# Altium PCB PCB_16x16.PcbDoc
Units mm, origin at the board's own origin, x right, y up, seen from the top; angles counter-clockwise.
Board outline 215 x 183 mm, 2 copper layers (Top Layer, Bottom Layer); 259 components, 32 nets, 560 pads, 280 vias.
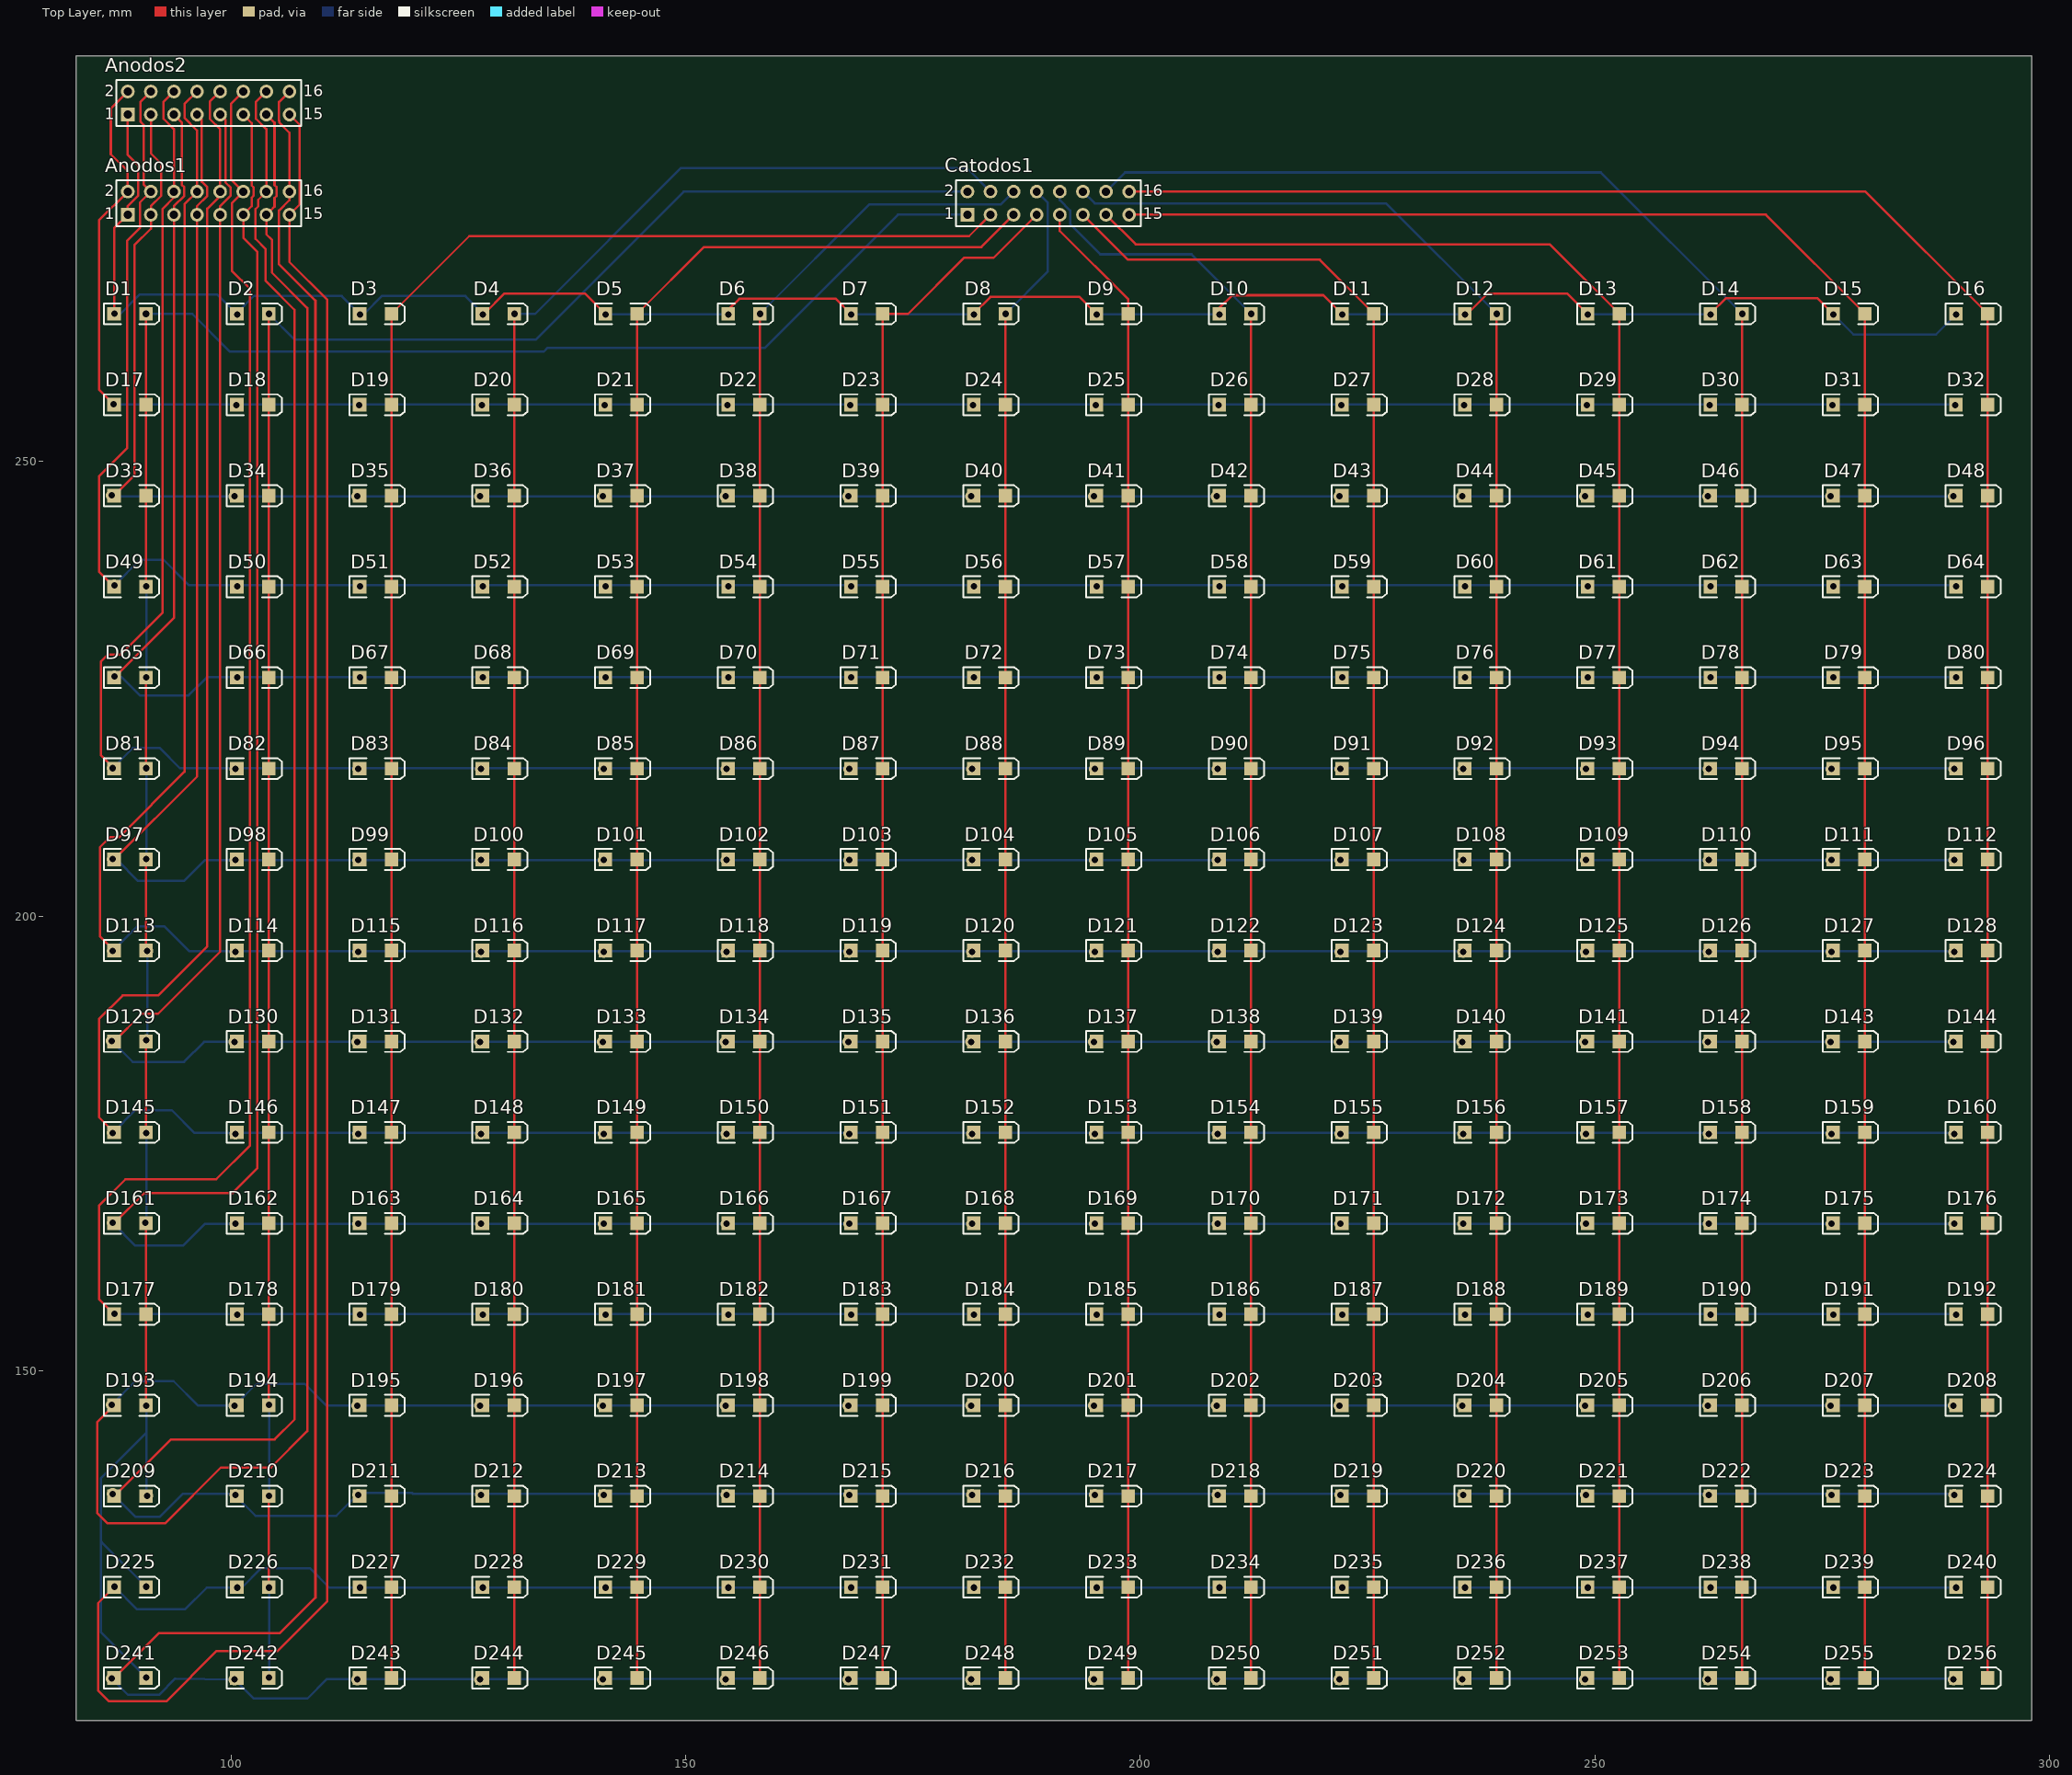
[diagram p0: Top Layer view]
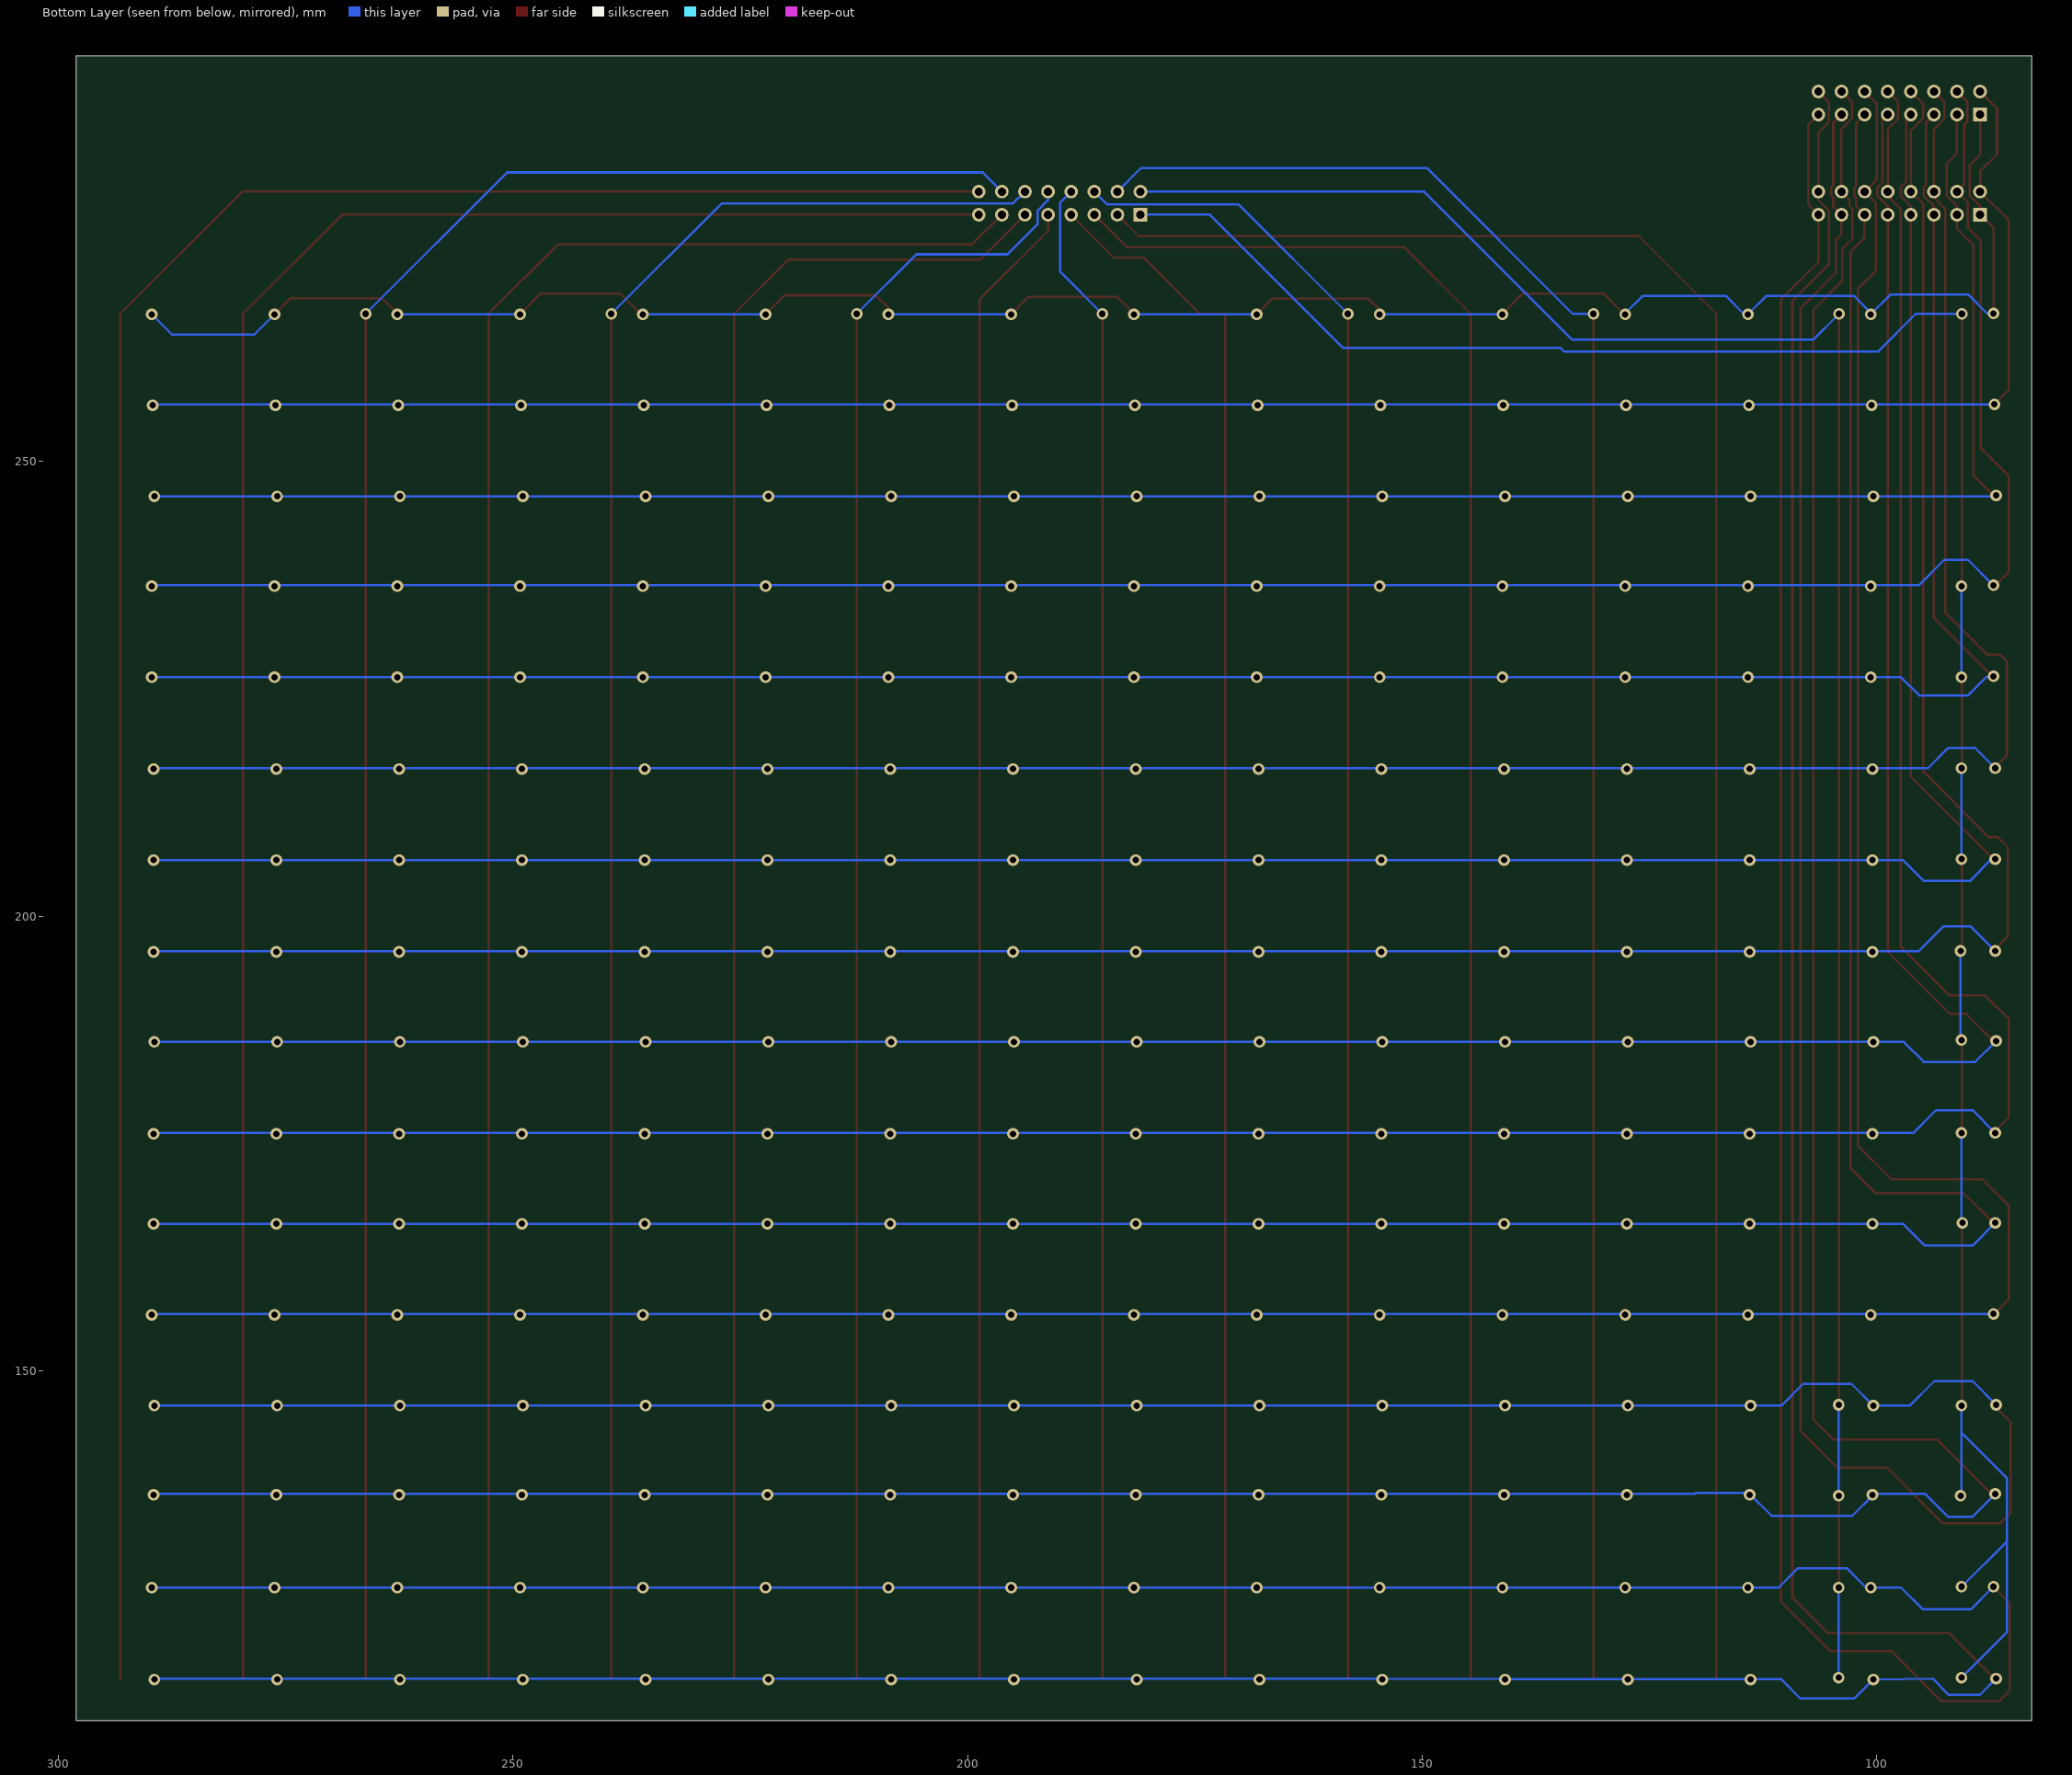
[diagram p1: Bottom Layer view, seen from below]

## Layer stack, top to bottom
Top Solder: solder mask 0.0102, Solder Resist, Dk 3.5
Top Layer: signal copper 0.0356
Dielectric 1: dielectric 0.32, FR-4, Dk 4.8
Bottom Layer: signal copper 0.0356
Bottom Solder: solder mask 0.0102, Solder Resist, Dk 3.5

## Board outline
83,111.6 298,111.6 298,294.6 83,294.6

## Design rules (kind name [scope] priority, off if disabled: settings)
Clearance [All] p1: gap=0.254
PolygonConnect [All] p1: connectstyle=Relief reliefconductorwidth=0.254 reliefentries=4 polygonreliefangle="90 Angle" airgapwidth=0.254
RoomDefinition "Esquematico LEDS" [InComponentClass('Esquematico LEDS')] p1: confinementstyle=ConfineIn formatcopy=TRUE lockcomponents=FALSE outline 83,294.6 83,111.6 298,111.6 298,294.6
RoutingVias [All] p1: holewidth=0.711 width=1.27 viastyle="Through Hole" minholewidth=0.711 minwidth=1.27 maxholewidth=0.711 maxwidth=1.27
SolderMaskExpansion [All] p1: expansion=0.102
Width [All] p1: maxlimit=0.254 minlimit=0.254 preferedwidth=0.254
30 further rules are at their usual default settings.

## Components (designator, comment, footprint, x,y, rotation, side; value= is the part's Value field where it differs from the comment)
Anodos1 "Header 8X2" HDR2X8 88.663,277.154 r0 top
Anodos2 "Header 8X2" HDR2X8 88.663,288.16 r0 top
Catodos1 "Header 8X2" HDR2X8 180.986,277.154 r0 top
D1 "LED2" 3.2X1.6X1.1 88.92,266.254 r0 top
D2 "LED2" 3.2X1.6X1.1 102.42,266.254 r0 top
D3 "LED2" 3.2X1.6X1.1 115.92,266.254 r0 top
D4 "LED2" 3.2X1.6X1.1 129.42,266.254 r0 top
D5 "LED2" 3.2X1.6X1.1 142.92,266.254 r0 top
D6 "LED2" 3.2X1.6X1.1 156.42,266.254 r0 top
D7 "LED2" 3.2X1.6X1.1 169.92,266.254 r0 top
D8 "LED2" 3.2X1.6X1.1 183.42,266.254 r0 top
D9 "LED2" 3.2X1.6X1.1 196.92,266.254 r0 top
D10 "LED2" 3.2X1.6X1.1 210.42,266.254 r0 top
D11 "LED2" 3.2X1.6X1.1 223.92,266.254 r0 top
D12 "LED2" 3.2X1.6X1.1 237.42,266.254 r0 top
D13 "LED2" 3.2X1.6X1.1 250.92,266.254 r0 top
D14 "LED2" 3.2X1.6X1.1 264.42,266.254 r0 top
D15 "LED2" 3.2X1.6X1.1 277.92,266.254 r0 top
D16 "LED2" 3.2X1.6X1.1 291.42,266.254 r0 top
D17 "LED2" 3.2X1.6X1.1 88.92,256.254 r0 top
D18 "LED2" 3.2X1.6X1.1 102.42,256.254 r0 top
D19 "LED2" 3.2X1.6X1.1 115.92,256.254 r0 top
D20 "LED2" 3.2X1.6X1.1 129.42,256.254 r0 top
D21 "LED2" 3.2X1.6X1.1 142.92,256.254 r0 top
D22 "LED2" 3.2X1.6X1.1 156.42,256.254 r0 top
D23 "LED2" 3.2X1.6X1.1 169.92,256.254 r0 top
D24 "LED2" 3.2X1.6X1.1 183.42,256.254 r0 top
D25 "LED2" 3.2X1.6X1.1 196.92,256.254 r0 top
D26 "LED2" 3.2X1.6X1.1 210.42,256.254 r0 top
D27 "LED2" 3.2X1.6X1.1 223.92,256.254 r0 top
D28 "LED2" 3.2X1.6X1.1 237.42,256.254 r0 top
D29 "LED2" 3.2X1.6X1.1 250.92,256.254 r0 top
D30 "LED2" 3.2X1.6X1.1 264.42,256.254 r0 top
D31 "LED2" 3.2X1.6X1.1 277.92,256.254 r0 top
D32 "LED2" 3.2X1.6X1.1 291.42,256.254 r0 top
D33 "LED2" 3.2X1.6X1.1 88.92,246.254 r0 top
D34 "LED2" 3.2X1.6X1.1 102.42,246.254 r0 top
D35 "LED2" 3.2X1.6X1.1 115.92,246.254 r0 top
D36 "LED2" 3.2X1.6X1.1 129.42,246.254 r0 top
D37 "LED2" 3.2X1.6X1.1 142.92,246.254 r0 top
D38 "LED2" 3.2X1.6X1.1 156.42,246.254 r0 top
D39 "LED2" 3.2X1.6X1.1 169.92,246.254 r0 top
D40 "LED2" 3.2X1.6X1.1 183.42,246.254 r0 top
D41 "LED2" 3.2X1.6X1.1 196.92,246.254 r0 top
D42 "LED2" 3.2X1.6X1.1 210.42,246.254 r0 top
D43 "LED2" 3.2X1.6X1.1 223.92,246.254 r0 top
D44 "LED2" 3.2X1.6X1.1 237.42,246.254 r0 top
D45 "LED2" 3.2X1.6X1.1 250.92,246.254 r0 top
D46 "LED2" 3.2X1.6X1.1 264.42,246.254 r0 top
D47 "LED2" 3.2X1.6X1.1 277.92,246.254 r0 top
D48 "LED2" 3.2X1.6X1.1 291.42,246.254 r0 top
D49 "LED2" 3.2X1.6X1.1 88.92,236.254 r0 top
D50 "LED2" 3.2X1.6X1.1 102.42,236.254 r0 top
D51 "LED2" 3.2X1.6X1.1 115.92,236.254 r0 top
D52 "LED2" 3.2X1.6X1.1 129.42,236.254 r0 top
D53 "LED2" 3.2X1.6X1.1 142.92,236.254 r0 top
D54 "LED2" 3.2X1.6X1.1 156.42,236.254 r0 top
D55 "LED2" 3.2X1.6X1.1 169.92,236.254 r0 top
D56 "LED2" 3.2X1.6X1.1 183.42,236.254 r0 top
D57 "LED2" 3.2X1.6X1.1 196.92,236.254 r0 top
D58 "LED2" 3.2X1.6X1.1 210.42,236.254 r0 top
D59 "LED2" 3.2X1.6X1.1 223.92,236.254 r0 top
D60 "LED2" 3.2X1.6X1.1 237.42,236.254 r0 top
D61 "LED2" 3.2X1.6X1.1 250.92,236.254 r0 top
D62 "LED2" 3.2X1.6X1.1 264.42,236.254 r0 top
D63 "LED2" 3.2X1.6X1.1 277.92,236.254 r0 top
D64 "LED2" 3.2X1.6X1.1 291.42,236.254 r0 top
D65 "LED2" 3.2X1.6X1.1 88.92,226.254 r0 top
D66 "LED2" 3.2X1.6X1.1 102.42,226.254 r0 top
D67 "LED2" 3.2X1.6X1.1 115.92,226.254 r0 top
D68 "LED2" 3.2X1.6X1.1 129.42,226.254 r0 top
D69 "LED2" 3.2X1.6X1.1 142.92,226.254 r0 top
D70 "LED2" 3.2X1.6X1.1 156.42,226.254 r0 top
D71 "LED2" 3.2X1.6X1.1 169.92,226.254 r0 top
D72 "LED2" 3.2X1.6X1.1 183.42,226.254 r0 top
D73 "LED2" 3.2X1.6X1.1 196.92,226.254 r0 top
D74 "LED2" 3.2X1.6X1.1 210.42,226.254 r0 top
D75 "LED2" 3.2X1.6X1.1 223.92,226.254 r0 top
D76 "LED2" 3.2X1.6X1.1 237.42,226.254 r0 top
D77 "LED2" 3.2X1.6X1.1 250.92,226.254 r0 top
D78 "LED2" 3.2X1.6X1.1 264.42,226.254 r0 top
D79 "LED2" 3.2X1.6X1.1 277.92,226.254 r0 top
D80 "LED2" 3.2X1.6X1.1 291.42,226.254 r0 top
D81 "LED2" 3.2X1.6X1.1 88.92,216.254 r0 top
D82 "LED2" 3.2X1.6X1.1 102.42,216.254 r0 top
D83 "LED2" 3.2X1.6X1.1 115.92,216.254 r0 top
D84 "LED2" 3.2X1.6X1.1 129.42,216.254 r0 top
D85 "LED2" 3.2X1.6X1.1 142.92,216.254 r0 top
D86 "LED2" 3.2X1.6X1.1 156.42,216.254 r0 top
D87 "LED2" 3.2X1.6X1.1 169.92,216.254 r0 top
D88 "LED2" 3.2X1.6X1.1 183.42,216.254 r0 top
D89 "LED2" 3.2X1.6X1.1 196.92,216.254 r0 top
D90 "LED2" 3.2X1.6X1.1 210.42,216.254 r0 top
D91 "LED2" 3.2X1.6X1.1 223.92,216.254 r0 top
D92 "LED2" 3.2X1.6X1.1 237.42,216.254 r0 top
D93 "LED2" 3.2X1.6X1.1 250.92,216.254 r0 top
D94 "LED2" 3.2X1.6X1.1 264.42,216.254 r0 top
D95 "LED2" 3.2X1.6X1.1 277.92,216.254 r0 top
D96 "LED2" 3.2X1.6X1.1 291.42,216.254 r0 top
D97 "LED2" 3.2X1.6X1.1 88.92,206.254 r0 top
D98 "LED2" 3.2X1.6X1.1 102.42,206.254 r0 top
D99 "LED2" 3.2X1.6X1.1 115.92,206.254 r0 top
D100 "LED2" 3.2X1.6X1.1 129.42,206.254 r0 top
D101 "LED2" 3.2X1.6X1.1 142.92,206.254 r0 top
D102 "LED2" 3.2X1.6X1.1 156.42,206.254 r0 top
D103 "LED2" 3.2X1.6X1.1 169.92,206.254 r0 top
D104 "LED2" 3.2X1.6X1.1 183.42,206.254 r0 top
D105 "LED2" 3.2X1.6X1.1 196.92,206.254 r0 top
D106 "LED2" 3.2X1.6X1.1 210.42,206.254 r0 top
D107 "LED2" 3.2X1.6X1.1 223.92,206.254 r0 top
D108 "LED2" 3.2X1.6X1.1 237.42,206.254 r0 top
D109 "LED2" 3.2X1.6X1.1 250.92,206.254 r0 top
D110 "LED2" 3.2X1.6X1.1 264.42,206.254 r0 top
D111 "LED2" 3.2X1.6X1.1 277.92,206.254 r0 top
D112 "LED2" 3.2X1.6X1.1 291.42,206.254 r0 top
D113 "LED2" 3.2X1.6X1.1 88.92,196.254 r0 top
D114 "LED2" 3.2X1.6X1.1 102.42,196.254 r0 top
D115 "LED2" 3.2X1.6X1.1 115.92,196.254 r0 top
D116 "LED2" 3.2X1.6X1.1 129.42,196.254 r0 top
D117 "LED2" 3.2X1.6X1.1 142.92,196.254 r0 top
D118 "LED2" 3.2X1.6X1.1 156.42,196.254 r0 top
D119 "LED2" 3.2X1.6X1.1 169.92,196.254 r0 top
D120 "LED2" 3.2X1.6X1.1 183.42,196.254 r0 top
D121 "LED2" 3.2X1.6X1.1 196.92,196.254 r0 top
D122 "LED2" 3.2X1.6X1.1 210.42,196.254 r0 top
D123 "LED2" 3.2X1.6X1.1 223.92,196.254 r0 top
D124 "LED2" 3.2X1.6X1.1 237.42,196.254 r0 top
D125 "LED2" 3.2X1.6X1.1 250.92,196.254 r0 top
D126 "LED2" 3.2X1.6X1.1 264.42,196.254 r0 top
D127 "LED2" 3.2X1.6X1.1 277.92,196.254 r0 top
D128 "LED2" 3.2X1.6X1.1 291.42,196.254 r0 top
D129 "LED2" 3.2X1.6X1.1 88.92,186.254 r0 top
D130 "LED2" 3.2X1.6X1.1 102.42,186.254 r0 top
D131 "LED2" 3.2X1.6X1.1 115.92,186.254 r0 top
D132 "LED2" 3.2X1.6X1.1 129.42,186.254 r0 top
D133 "LED2" 3.2X1.6X1.1 142.92,186.254 r0 top
D134 "LED2" 3.2X1.6X1.1 156.42,186.254 r0 top
D135 "LED2" 3.2X1.6X1.1 169.92,186.254 r0 top
D136 "LED2" 3.2X1.6X1.1 183.42,186.254 r0 top
D137 "LED2" 3.2X1.6X1.1 196.92,186.254 r0 top
D138 "LED2" 3.2X1.6X1.1 210.42,186.254 r0 top
D139 "LED2" 3.2X1.6X1.1 223.92,186.254 r0 top
D140 "LED2" 3.2X1.6X1.1 237.42,186.254 r0 top
D141 "LED2" 3.2X1.6X1.1 250.92,186.254 r0 top
D142 "LED2" 3.2X1.6X1.1 264.42,186.254 r0 top
D143 "LED2" 3.2X1.6X1.1 277.92,186.254 r0 top
D144 "LED2" 3.2X1.6X1.1 291.42,186.254 r0 top
D145 "LED2" 3.2X1.6X1.1 88.92,176.254 r0 top
D146 "LED2" 3.2X1.6X1.1 102.42,176.254 r0 top
D147 "LED2" 3.2X1.6X1.1 115.92,176.254 r0 top
D148 "LED2" 3.2X1.6X1.1 129.42,176.254 r0 top
D149 "LED2" 3.2X1.6X1.1 142.92,176.254 r0 top
D150 "LED2" 3.2X1.6X1.1 156.42,176.254 r0 top
D151 "LED2" 3.2X1.6X1.1 169.92,176.254 r0 top
D152 "LED2" 3.2X1.6X1.1 183.42,176.254 r0 top
D153 "LED2" 3.2X1.6X1.1 196.92,176.254 r0 top
D154 "LED2" 3.2X1.6X1.1 210.42,176.254 r0 top
D155 "LED2" 3.2X1.6X1.1 223.92,176.254 r0 top
D156 "LED2" 3.2X1.6X1.1 237.42,176.254 r0 top
D157 "LED2" 3.2X1.6X1.1 250.92,176.254 r0 top
D158 "LED2" 3.2X1.6X1.1 264.42,176.254 r0 top
D159 "LED2" 3.2X1.6X1.1 277.92,176.254 r0 top
D160 "LED2" 3.2X1.6X1.1 291.42,176.254 r0 top
D161 "LED2" 3.2X1.6X1.1 88.92,166.254 r0 top
D162 "LED2" 3.2X1.6X1.1 102.42,166.254 r0 top
D163 "LED2" 3.2X1.6X1.1 115.92,166.254 r0 top
D164 "LED2" 3.2X1.6X1.1 129.42,166.254 r0 top
D165 "LED2" 3.2X1.6X1.1 142.92,166.254 r0 top
D166 "LED2" 3.2X1.6X1.1 156.42,166.254 r0 top
D167 "LED2" 3.2X1.6X1.1 169.92,166.254 r0 top
D168 "LED2" 3.2X1.6X1.1 183.42,166.254 r0 top
D169 "LED2" 3.2X1.6X1.1 196.92,166.254 r0 top
D170 "LED2" 3.2X1.6X1.1 210.42,166.254 r0 top
D171 "LED2" 3.2X1.6X1.1 223.92,166.254 r0 top
D172 "LED2" 3.2X1.6X1.1 237.42,166.254 r0 top
D173 "LED2" 3.2X1.6X1.1 250.92,166.254 r0 top
D174 "LED2" 3.2X1.6X1.1 264.42,166.254 r0 top
D175 "LED2" 3.2X1.6X1.1 277.92,166.254 r0 top
D176 "LED2" 3.2X1.6X1.1 291.42,166.254 r0 top
D177 "LED2" 3.2X1.6X1.1 88.92,156.254 r0 top
D178 "LED2" 3.2X1.6X1.1 102.42,156.254 r0 top
D179 "LED2" 3.2X1.6X1.1 115.92,156.254 r0 top
D180 "LED2" 3.2X1.6X1.1 129.42,156.254 r0 top
D181 "LED2" 3.2X1.6X1.1 142.92,156.254 r0 top
D182 "LED2" 3.2X1.6X1.1 156.42,156.254 r0 top
D183 "LED2" 3.2X1.6X1.1 169.92,156.254 r0 top
D184 "LED2" 3.2X1.6X1.1 183.42,156.254 r0 top
D185 "LED2" 3.2X1.6X1.1 196.92,156.254 r0 top
D186 "LED2" 3.2X1.6X1.1 210.42,156.254 r0 top
D187 "LED2" 3.2X1.6X1.1 223.92,156.254 r0 top
D188 "LED2" 3.2X1.6X1.1 237.42,156.254 r0 top
D189 "LED2" 3.2X1.6X1.1 250.92,156.254 r0 top
D190 "LED2" 3.2X1.6X1.1 264.42,156.254 r0 top
D191 "LED2" 3.2X1.6X1.1 277.92,156.254 r0 top
D192 "LED2" 3.2X1.6X1.1 291.42,156.254 r0 top
D193 "LED2" 3.2X1.6X1.1 88.92,146.254 r0 top
D194 "LED2" 3.2X1.6X1.1 102.42,146.254 r0 top
D195 "LED2" 3.2X1.6X1.1 115.92,146.254 r0 top
D196 "LED2" 3.2X1.6X1.1 129.42,146.254 r0 top
D197 "LED2" 3.2X1.6X1.1 142.92,146.254 r0 top
D198 "LED2" 3.2X1.6X1.1 156.42,146.254 r0 top
D199 "LED2" 3.2X1.6X1.1 169.92,146.254 r0 top
D200 "LED2" 3.2X1.6X1.1 183.42,146.254 r0 top
D201 "LED2" 3.2X1.6X1.1 196.92,146.254 r0 top
D202 "LED2" 3.2X1.6X1.1 210.42,146.254 r0 top
D203 "LED2" 3.2X1.6X1.1 223.92,146.254 r0 top
D204 "LED2" 3.2X1.6X1.1 237.42,146.254 r0 top
D205 "LED2" 3.2X1.6X1.1 250.92,146.254 r0 top
D206 "LED2" 3.2X1.6X1.1 264.42,146.254 r0 top
D207 "LED2" 3.2X1.6X1.1 277.92,146.254 r0 top
D208 "LED2" 3.2X1.6X1.1 291.42,146.254 r0 top
D209 "LED2" 3.2X1.6X1.1 88.92,136.254 r0 top
D210 "LED2" 3.2X1.6X1.1 102.42,136.254 r0 top
D211 "LED2" 3.2X1.6X1.1 115.92,136.254 r0 top
D212 "LED2" 3.2X1.6X1.1 129.42,136.254 r0 top
D213 "LED2" 3.2X1.6X1.1 142.92,136.254 r0 top
D214 "LED2" 3.2X1.6X1.1 156.42,136.254 r0 top
D215 "LED2" 3.2X1.6X1.1 169.92,136.254 r0 top
D216 "LED2" 3.2X1.6X1.1 183.42,136.254 r0 top
D217 "LED2" 3.2X1.6X1.1 196.92,136.254 r0 top
D218 "LED2" 3.2X1.6X1.1 210.42,136.254 r0 top
D219 "LED2" 3.2X1.6X1.1 223.92,136.254 r0 top
D220 "LED2" 3.2X1.6X1.1 237.42,136.254 r0 top
D221 "LED2" 3.2X1.6X1.1 250.92,136.254 r0 top
D222 "LED2" 3.2X1.6X1.1 264.42,136.254 r0 top
D223 "LED2" 3.2X1.6X1.1 277.92,136.254 r0 top
D224 "LED2" 3.2X1.6X1.1 291.42,136.254 r0 top
D225 "LED2" 3.2X1.6X1.1 88.92,126.254 r0 top
D226 "LED2" 3.2X1.6X1.1 102.42,126.254 r0 top
D227 "LED2" 3.2X1.6X1.1 115.92,126.254 r0 top
D228 "LED2" 3.2X1.6X1.1 129.42,126.254 r0 top
D229 "LED2" 3.2X1.6X1.1 142.92,126.254 r0 top
D230 "LED2" 3.2X1.6X1.1 156.42,126.254 r0 top
D231 "LED2" 3.2X1.6X1.1 169.92,126.254 r0 top
D232 "LED2" 3.2X1.6X1.1 183.42,126.254 r0 top
D233 "LED2" 3.2X1.6X1.1 196.92,126.254 r0 top
D234 "LED2" 3.2X1.6X1.1 210.42,126.254 r0 top
D235 "LED2" 3.2X1.6X1.1 223.92,126.254 r0 top
D236 "LED2" 3.2X1.6X1.1 237.42,126.254 r0 top
D237 "LED2" 3.2X1.6X1.1 250.92,126.254 r0 top
D238 "LED2" 3.2X1.6X1.1 264.42,126.254 r0 top
D239 "LED2" 3.2X1.6X1.1 277.92,126.254 r0 top
D240 "LED2" 3.2X1.6X1.1 291.42,126.254 r0 top
D241 "LED2" 3.2X1.6X1.1 88.92,116.254 r0 top
D242 "LED2" 3.2X1.6X1.1 102.42,116.254 r0 top
D243 "LED2" 3.2X1.6X1.1 115.92,116.254 r0 top
D244 "LED2" 3.2X1.6X1.1 129.42,116.254 r0 top
D245 "LED2" 3.2X1.6X1.1 142.92,116.254 r0 top
D246 "LED2" 3.2X1.6X1.1 156.42,116.254 r0 top
D247 "LED2" 3.2X1.6X1.1 169.92,116.254 r0 top
D248 "LED2" 3.2X1.6X1.1 183.42,116.254 r0 top
D249 "LED2" 3.2X1.6X1.1 196.92,116.254 r0 top
D250 "LED2" 3.2X1.6X1.1 210.42,116.254 r0 top
D251 "LED2" 3.2X1.6X1.1 223.92,116.254 r0 top
D252 "LED2" 3.2X1.6X1.1 237.42,116.254 r0 top
D253 "LED2" 3.2X1.6X1.1 250.92,116.254 r0 top
D254 "LED2" 3.2X1.6X1.1 264.42,116.254 r0 top
D255 "LED2" 3.2X1.6X1.1 277.92,116.254 r0 top
D256 "LED2" 3.2X1.6X1.1 291.42,116.254 r0 top

## Footprints (in the part's own frame and the unit in brackets; to place one, negate y for a bottom-side part, rotate by r counter-clockwise, add the part's x,y. Pads: shape width x height; smd on the part's side, far side on the other; paste and mask are expansions set on the pad)
3.2X1.6X1.1 [mm] "SMT LED; 2 Flat Leads"
  rect 1.5x1.5 smd: 1(-1.75,0) 2(1.75,0)
  silkscreen extent -2.9,-1.15 3.2,1.15
HDR2X8 [mm] "Connector; Header; 8x2 Position"
  rect 1.5x1.5 hole 0.9: 1(0,0)
  round 1.5 hole 0.9: 2(0,2.54) 3(2.54,0) 4(2.54,2.54) 5(5.08,0) 6(5.08,2.54) 7(7.62,0) 8(7.62,2.54) 9(10.16,0) 10(10.16,2.54) 11(12.7,0) 12(12.7,2.54) 13(15.24,0) 14(15.24,2.54) 15(17.78,0) 16(17.78,2.54)
  silkscreen extent -1.27,-1.27 19.05,3.81

## Part data
Anodos1 Anodos2 Catodos1: "Header, 8-Pin, Dual row"
D1 D2 D3 D4 D5 D6 D7 D8 D9 D10 D11 D12 D13 D14 D15 D16 D17 D18 D19 D20 D21 D22 D23 D24 D25 D26 D27 D28 D29 D30 D31 D32 D33 D34 D35 D36 D37 D38 D39 D40 D41 D42 D43 D44 D45 D46 D47 D48 D49 D50 D51 D52 D53 D54 D55 D56 D57 D58 D59 D60 D61 D62 D63 D64 D65 D66 D67 D68 D69 D70 D71 D72 D73 D74 D75 D76 D77 D78 D79 D80 D81 D82 D83 D84 D85 D86 D87 D88 D89 D90 D91 D92 D93 D94 D95 D96 D97 D98 D99 D100 D101 D102 D103 D104 D105 D106 D107 D108 D109 D110 D111 D112 D113 D114 D115 D116 D117 D118 D119 D120 D121 D122 D123 D124 D125 D126 D127 D128 D129 D130 D131 D132 D133 D134 D135 D136 D137 D138 D139 D140 D141 D142 D143 D144 D145 D146 D147 D148 D149 D150 D151 D152 D153 D154 D155 D156 D157 D158 D159 D160 D161 D162 D163 D164 D165 D166 D167 D168 D169 D170 D171 D172 D173 D174 D175 D176 D177 D178 D179 D180 D181 D182 D183 D184 D185 D186 D187 D188 D189 D190 D191 D192 D193 D194 D195 D196 D197 D198 D199 D200 D201 D202 D203 D204 D205 D206 D207 D208 D209 D210 D211 D212 D213 D214 D215 D216 D217 D218 D219 D220 D221 D222 D223 D224 D225 D226 D227 D228 D229 D230 D231 D232 D233 D234 D235 D236 D237 D238 D239 D240 D241 D242 D243 D244 D245 D246 D247 D248 D249 D250 D251 D252 D253 D254 D255 D256: "Typical RED, GREEN, YELLOW, AMBER GaAs LED"

## Via types
v1: diameter 1.27, hole 0.711, Top Layer to Bottom Layer, 280 vias

## Nets (pads, with @x,y where several pads share a name; then routed paths per layer and width w, separated by ;. In a path a pad name is that pad's centre, name@x,y a point inside that pad or via, vN(x,y) a via of type N, cw(c..) or ccw(c..) an arc to the next point about the centre after c; other vN are vias at no path point)
NetAnodos1_1: Anodos1.1 Anodos2.1 D1.1 D2.1 D3.1 D4.1 D5.1 D6.1 D7.1 D8.1 D9.1 D10.1 D11.1 D12.1 D13.1 D14.1 D15.1 D16.1 | length 243.3
  Top Layer w0.254: D1.1 87.17,275.661 Anodos1.1 ; Anodos1.1 88.663,278.095 89.794,279.226 89.794,282.606 88.663,283.737 Anodos2.1 ; D4.1@127.7,266.3 127.9,266.3 130.1,268.5 138.924,268.5 D5.1 ; D6.1 154.67,266.67 155.9,267.9 166.524,267.9 D7.1 ; D8.1 183.516,268.1 193.324,268.1 D9.1 ; D10.1 208.67,266.87 210.1,268.3 220.124,268.3 D11.1 ; D12.1 235.954,266.254 238.2,268.5 246.924,268.5 D13.1 ; D14.1 264.4,267.984 274.44,267.984 D15.1
  Bottom Layer w0.254: v1(87.2,266.3) 87.7,266.3 87.8,266.2 90,268.4 98.5,268.4 v1(100.7,266.2) 100.7,266.4 102.5,268.2 112.2,268.2 114.1,266.3 114.7,266.3 116.6,268.2 125.8,268.2 v1@127.7,266.3 ; v1(141.2,266.2) v1(154.7,266.2) ; v1(168.2,266.2) v1(181.7,266.2) ; v1(195.2,266.2) v1(208.7,266.2) ; v1(222.2,266.2) v1(235.7,266.2) ; v1(249.2,266.2) v1(262.7,266.2) ; v1(276.2,266.2) 278.4,264 287.5,264 v1(289.7,266.2)
  other v1: 114.2,266.2 127.7,266.2
NetAnodos1_2: Anodos1.2 Anodos2.2 D17.1 D18.1 D19.1 D20.1 D21.1 D22.1 D23.1 D24.1 D25.1 D26.1 D27.1 D28.1 D29.1 D30.1 D31.1 D32.1 | length 240.5
  Top Layer w0.254: D17.1 85.5,257.924 85.5,276.531 Anodos1.2 88.663,281.937 86.8,283.8 86.8,288.837 Anodos2.2
  Bottom Layer w0.254: v1(87.1,256.3) 114.1,256.3 168.1,256.3 208.6,256.3 262.6,256.3 289.5,256.3 v1(289.6,256.2)
  other v1: 100.6,256.2 114.1,256.2 127.6,256.2 141.1,256.2 154.6,256.2 168.1,256.2 181.6,256.2 195.1,256.2 208.6,256.2 222.1,256.2 235.6,256.2 249.1,256.2 262.6,256.2 276.1,256.2
NetAnodos1_3: Anodos1.3 Anodos2.3 D33.1 D34.1 D35.1 D36.1 D37.1 D38.1 D39.1 D40.1 D41.1 D42.1 D43.1 D44.1 D45.1 D46.1 D47.1 D48.1 | length 247.1
  Top Layer w0.254: D33.1 89.4,248.484 89.4,273.8 91.203,275.603 Anodos1.3 ; Anodos1.3 91.203,278.095 92.334,279.226 92.334,282.766 91.203,283.897 Anodos2.3
  Bottom Layer w0.254: v1(86.9,246.3) 87,246.2 v1(100.4,246.2) v1(113.9,246.2) v1(127.4,246.2) v1(140.9,246.2) v1(154.4,246.2) v1(167.9,246.2) v1(181.4,246.2) v1(194.9,246.2) v1(208.4,246.2) v1(221.9,246.2) v1(235.4,246.2) v1(248.9,246.2) v1(262.4,246.2) v1(275.9,246.2) v1(289.4,246.2)
NetAnodos1_4: Anodos1.4 Anodos2.4 D49.1 D50.1 D51.1 D52.1 D53.1 D54.1 D55.1 D56.1 D57.1 D58.1 D59.1 D60.1 D61.1 D62.1 D63.1 D64.1 | length 263.3
  Top Layer w0.254: D49.1 85.5,237.924 85.5,248.4 88.6,251.5 88.6,274.3 90,275.7 90,278.491 Anodos1.4 90.4,280.497 90.4,287.036 90.072,287.364 90.072,289.569 Anodos2.4
  Bottom Layer w0.254: v1(87.2,236.4) 90,239.2 92.6,239.2 95.4,236.4 100.7,236.4 154.7,236.4 181.7,236.4 208.7,236.4 262.7,236.4 289.6,236.4 v1(289.7,236.3)
  other v1: 100.7,236.3 114.2,236.3 127.7,236.3 141.2,236.3 154.7,236.3 168.2,236.3 181.7,236.3 195.2,236.3 208.7,236.3 222.2,236.3 235.7,236.3 249.2,236.3 262.7,236.3 276.2,236.3
NetAnodos1_5: Anodos1.5 Anodos2.5 D65.1 D66.1 D67.1 D68.1 D69.1 D70.1 D71.1 D72.1 D73.1 D74.1 D75.1 D76.1 D77.1 D78.1 D79.1 D80.1 | length 269.8
  Top Layer w0.254: D65.1 93.743,232.827 Anodos1.5 ; Anodos1.5 93.743,278.095 94.874,279.226 94.874,280.162 94.6,280.437 94.6,287.303 Anodos2.5
  Bottom Layer w0.254: v1(87.2,226.4) 87.3,226.3 88,226.3 90,224.3 95.35,224.3 97.35,226.3 v1(100.7,226.3) v1(114.2,226.3) v1(127.7,226.3) v1(141.2,226.3) v1(154.7,226.3) v1(168.2,226.3) v1(181.7,226.3) v1(195.2,226.3) v1(208.7,226.3) v1(222.2,226.3) v1(235.7,226.3) v1(249.2,226.3) v1(262.7,226.3) v1(276.2,226.3) v1(289.7,226.3)
NetAnodos1_6: Anodos1.6 Anodos2.6 D81.1 D82.1 D83.1 D84.1 D85.1 D86.1 D87.1 D88.1 D89.1 D90.1 D91.1 D92.1 D93.1 D94.1 D95.1 D96.1 | length 283.9
  Top Layer w0.254: D81.1 85.7,217.724 85.7,228 86.5,228.8 87.9,228.8 92.5,233.4 92.5,277.8 Anodos1.6@93.743,279.043 ; Anodos1.6 93.743,286.561 92.612,287.692 92.612,289.569 Anodos2.6
  Bottom Layer w0.254: v1(87,216.3) 89.2,218.5 92.2,218.5 94.4,216.3 100.5,216.3 154.5,216.3 181.5,216.3 208.5,216.3 262.5,216.3 289.4,216.3 v1(289.5,216.2)
  other v1: 100.5,216.2 114,216.2 127.5,216.2 141,216.2 154.5,216.2 168,216.2 181.5,216.2 195,216.2 208.5,216.2 222,216.2 235.5,216.2 249,216.2 262.5,216.2 276,216.2
NetAnodos1_7: Anodos1.7 Anodos2.7 D97.1 D98.1 D99.1 D100.1 D101.1 D102.1 D103.1 D104.1 D105.1 D106.1 D107.1 D108.1 D109.1 D110.1 D111.1 D112.1 | length 291.1
  Top Layer w0.254: D97.1 96.283,215.367 Anodos1.7 ; Anodos1.7 96.283,278.095 97.414,279.226 97.414,280.162 96.8,280.777 96.8,287.643 Anodos2.7
  Bottom Layer w0.254: v1(87,206.3) 87.1,206.2 87.5,206.2 89.8,203.9 94.85,203.9 97.15,206.2 v1(100.5,206.2) v1(114,206.2) v1(127.5,206.2) v1(141,206.2) v1(154.5,206.2) v1(168,206.2) v1(181.5,206.2) v1(195,206.2) v1(208.5,206.2) v1(222,206.2) v1(235.5,206.2) v1(249,206.2) v1(262.5,206.2) v1(276,206.2) v1(289.5,206.2)
NetAnodos1_8: Anodos1.8 Anodos2.8 D113.1 D114.1 D115.1 D116.1 D117.1 D118.1 D119.1 D120.1 D121.1 D122.1 D123.1 D124.1 D125.1 D126.1 D127.1 D128.1 | length 306
  Top Layer w0.254: D113.1 85.6,197.824 85.6,207.6 86.7,208.7 87.7,208.7 94.9,215.9 94.9,278.311 Anodos1.8 96.283,286.417 94.9,287.8 94.9,289.317 Anodos2.8
  Bottom Layer w0.254: v1(87,196.2) 89.7,198.9 92.7,198.9 95.4,196.2 181.5,196.2 208.5,196.2 262.5,196.2 289.4,196.2 v1(289.5,196.1)
  other v1: 100.5,196.1 114,196.1 127.5,196.1 141,196.1 154.5,196.1 168,196.1 181.5,196.1 195,196.1 208.5,196.1 222,196.1 235.5,196.1 249,196.1 262.5,196.1 276,196.1
NetAnodos1_9: Anodos1.9 Anodos2.9 D129.1 D130.1 D131.1 D132.1 D133.1 D134.1 D135.1 D136.1 D137.1 D138.1 D139.1 D140.1 D141.1 D142.1 D143.1 D144.1 | length 313.1
  Top Layer w0.254: D129.1 90.216,189.3 92,189.3 98.823,196.123 Anodos1.9 ; Anodos1.9 98.823,278.095 99.954,279.226 99.954,280.162 99.4,280.717 99.4,287.583 Anodos2.9
  Bottom Layer w0.254: v1(86.9,186.3) 89.2,184 94.85,184 97.05,186.2 v1(100.4,186.2) v1(113.9,186.2) v1(127.4,186.2) v1(140.9,186.2) v1(154.4,186.2) v1(167.9,186.2) v1(181.4,186.2) v1(194.9,186.2) v1(208.4,186.2) v1(221.9,186.2) v1(235.4,186.2) v1(248.9,186.2) v1(262.4,186.2) v1(275.9,186.2) v1(289.4,186.2)
NetAnodos1_10: Anodos1.10 Anodos2.10 D145.1 D146.1 D147.1 D148.1 D149.1 D150.1 D151.1 D152.1 D153.1 D154.1 D155.1 D156.1 D157.1 D158.1 D159.1 D160.1 | length 328
  Top Layer w0.254: D145.1 85.5,177.924 85.5,188.7 88.1,191.3 92,191.3 97.4,196.7 97.4,276.657 97.414,276.671 97.414,277.814 Anodos1.10@98.823,279.223 ; Anodos1.10 98.823,286.561 97.692,287.692 97.692,289.569 Anodos2.10
  Bottom Layer w0.254: v1(87,176.2) 89.5,178.7 93.5,178.7 96,176.2 168,176.2 195,176.2 222,176.2 262.5,176.2 289.4,176.2 v1(289.5,176.1)
  other v1: 100.5,176.1 114,176.1 127.5,176.1 141,176.1 154.5,176.1 168,176.1 181.5,176.1 195,176.1 208.5,176.1 222,176.1 235.5,176.1 249,176.1 262.5,176.1 276,176.1
NetAnodos1_11: Anodos1.11 Anodos2.11 D161.1 D162.1 D163.1 D164.1 D165.1 D166.1 D167.1 D168.1 D169.1 D170.1 D171.1 D172.1 D173.1 D174.1 D175.1 D176.1 | length 340.2
  Top Layer w0.254: D161.1 90.516,169.6 100.2,169.6 102.9,172.3 102.9,273.1 101.363,274.637 Anodos1.11 102.3,278.091 102.3,279.031 102.494,279.226 102.494,280.162 102.3,280.357 102.3,287.223 Anodos2.11
  Bottom Layer w0.254: v1(87,166.3) 89.5,163.8 94.75,163.8 97.15,166.2 v1(100.5,166.2) v1(114,166.2) v1(127.5,166.2) v1(141,166.2) v1(154.5,166.2) v1(168,166.2) v1(181.5,166.2) v1(195,166.2) v1(208.5,166.2) v1(222,166.2) v1(235.5,166.2) v1(249,166.2) v1(262.5,166.2) v1(276,166.2) v1(289.5,166.2)
NetAnodos1_12: Anodos1.12 Anodos2.12 D177.1 D178.1 D179.1 D180.1 D181.1 D182.1 D183.1 D184.1 D185.1 D186.1 D187.1 D188.1 D189.1 D190.1 D191.1 D192.1 | length 352.9
  Top Layer w0.254: D177.1 85.5,157.924 85.5,168.2 88.4,171.1 98.4,171.1 102.1,174.8 102.1,269 100.1,271 100.1,278.431 Anodos1.12 100,281.057 100,289.337 Anodos2.12
  Bottom Layer w0.254: v1(87.2,156.3) 127.7,156.3 154.7,156.3 181.7,156.3 208.7,156.3 262.7,156.3 289.6,156.3 v1(289.7,156.2)
  other v1: 100.7,156.2 114.2,156.2 127.7,156.2 141.2,156.2 154.7,156.2 168.2,156.2 181.7,156.2 195.2,156.2 208.7,156.2 222.2,156.2 235.7,156.2 249.2,156.2 262.7,156.2 276.2,156.2
NetAnodos1_13: Anodos1.13 Anodos2.13 D193.1 D194.1 D195.1 D196.1 D197.1 D198.1 D199.1 D200.1 D201.1 D202.1 D203.1 D204.1 D205.1 D206.1 D207.1 D208.1 | length 394.7
  Top Layer w0.254: D193.1 85.3,144.384 85.3,134.4 86.4,133.3 92.8,133.3 98.9,139.4 104.4,139.4 108.4,143.4 108.4,266.9 104.5,270.8 104.5,274.4 103.903,274.997 Anodos1.13 103.903,277.303 Anodos1.13@104.3,277.7 ; Anodos2.13 104.8,287.263 104.8,280.397 105.034,280.162 105.034,279.226 104.8,278.991 104.8,278.051 Anodos1.13@104.375,277.625
  Bottom Layer w0.254: v1(86.9,146.3) 89.5,148.9 93.7,148.9 96.4,146.2 v1(100.4,146.2) 102.8,148.6 108.125,148.6 110.525,146.2 v1(113.9,146.2) v1(127.4,146.2) v1(140.9,146.2) v1(154.4,146.2) v1(167.9,146.2) v1(181.4,146.2) v1(194.9,146.2) v1(208.4,146.2) v1(221.9,146.2) v1(235.4,146.2) v1(248.9,146.2) v1(262.4,146.2) v1(275.9,146.2) v1(289.4,146.2)
NetAnodos1_14: Anodos1.14 Anodos2.14 D209.1 D210.1 D211.1 D212.1 D213.1 D214.1 D215.1 D216.1 D217.1 D218.1 D219.1 D220.1 D221.1 D222.1 D223.1 D224.1 | length 379.2
  Top Layer w0.254: D209.1 93.416,142.5 104.8,142.5 107,144.7 107,266.7 103.8,269.9 103.8,273.4 102.7,274.5 102.7,277.772 103.002,278.075 103.002,278.793 Anodos1.14 103.903,286.561 102.772,287.692 102.772,289.569 Anodos2.14
  Bottom Layer w0.254: v1(87,136.5) 89.5,134 92.2,134 94.7,136.5 100.3,136.5 102.7,134.1 111.6,134.1 114.1,136.6 119.937,136.6 120.037,136.5 154.5,136.5 181.5,136.5 249,136.5 289.4,136.5 v1(289.5,136.4)
  other v1: 100.5,136.4 114,136.4 127.5,136.4 141,136.4 154.5,136.4 168,136.4 181.5,136.4 195,136.4 208.5,136.4 222,136.4 235.5,136.4 249,136.4 262.5,136.4 276,136.4
NetAnodos1_15: Anodos1.15 Anodos2.15 D225.1 D226.1 D227.1 D228.1 D229.1 D230.1 D231.1 D232.1 D233.1 D234.1 D235.1 D236.1 D237.1 D238.1 D239.1 D240.1 | length 414.7
  Top Layer w0.254: D225.1 85.4,124.484 85.4,114.9 86.6,113.7 92.9,113.7 98.4,119.2 105.1,119.2 110.6,124.7 110.6,267.8 106.443,271.957 Anodos1.15 107.574,278.285 107.574,287.029 Anodos2.15
  Bottom Layer w0.254: v1(87.2,126.3) 89.7,123.8 94.95,123.8 97.35,126.2 v1(100.7,126.2) 101.2,126.2 103.3,128.3 108.725,128.3 110.825,126.2 v1(114.2,126.2) v1(127.7,126.2) v1(141.2,126.2) v1(154.7,126.2) v1(168.2,126.2) v1(181.7,126.2) v1(195.2,126.2) v1(208.7,126.2) v1(222.2,126.2) v1(235.7,126.2) v1(249.2,126.2) v1(262.7,126.2) v1(276.2,126.2) v1(289.7,126.2)
NetAnodos1_16: Anodos1.16 Anodos2.16 D241.1 D242.1 D243.1 D244.1 D245.1 D246.1 D247.1 D248.1 D249.1 D250.1 D251.1 D252.1 D253.1 D254.1 D255.1 D256.1 | length 400.3
  Top Layer w0.254: D241.1 92.116,121.2 105.4,121.2 109.3,125.1 109.3,267.7 105.3,271.7 105.3,277.61 106.443,278.753 Anodos1.16 106.443,286.157 105.308,287.292 105.308,287.474 105.3,287.482 105.3,289.557 Anodos2.16
  Bottom Layer w0.254: v1(86.9,116.2) 88.7,114.4 92.1,114.4 93.9,116.2 v1(100.4,116.1) 102.513,113.994 108.418,114.002 110.525,116.115 113.9,116.12 127.4,116.14 140.9,116.16 154.4,116.18 167.9,116.2 181.4,116.2 248.9,116.2 289.3,116.2 v1(289.4,116.1)
  other v1: 113.9,116.1 127.4,116.1 140.9,116.1 154.4,116.1 167.9,116.1 181.4,116.1 194.9,116.1 208.4,116.1 221.9,116.1 235.4,116.1 248.9,116.1 262.4,116.1 275.9,116.1
NetCatodos1_1: Catodos1.1 D1.2 D17.2 D33.2 D49.2 D65.2 D81.2 D97.2 D113.2 D129.2 D145.2 D161.2 D177.2 D193.2 D209.2 D225.2 D241.2 | length 266.1
  Top Layer w0.254: D193.2 D161.2 ; D145.2 D129.2 ; D113.2 D97.2 ; D81.2 D65.2 ; D49.2 D17.2 v1(90.67,266.254)
  Bottom Layer w0.254: v1(90.6,166.3) 90.7,166.4 v1(90.7,176.2) ; v1(90.67,266.254) 95.754,266.254 99.908,262.1 134.4,262.1 134.8,262.5 158.7,262.5 173.354,277.154 Catodos1.1 ; v1(90.7,116.3) 85.7,121.3 85.7,131.2 ; v1(90.7,126.3) 85.8,131.2 85.7,131.2 ; v1(90.7,146.2) 90.7,143.2 ; v1(90.7,186.4) 90.8,186.5 v1(90.8,196.2) ; v1(90.7,206.3) v1(90.7,216.3) ; v1(90.7,226.3) v1(90.7,236.3) ; v1(90.8,136.3) 90.7,136.4 90.7,143.2 ; 85.7,131.2 85.7,138.2 90.7,143.2
NetCatodos1_2: Catodos1.2 D2.2 D18.2 D34.2 D50.2 D66.2 D82.2 D98.2 D114.2 D130.2 D146.2 D162.2 D178.2 D194.2 D210.2 D226.2 D242.2 | length 234.6
  Top Layer w0.254: D226.2 D210.2 ; D194.2 D178.2 D146.2 D98.2 D82.2 D66.2 D50.2 D34.2 D18.2 v1(104.17,266.254)
  Bottom Layer w0.254: v1(104.17,266.254) 107.024,263.4 133.5,263.4 149.794,279.694 Catodos1.2 ; v1(104.2,116.3) v1(104.2,126.2) ; v1(104.2,136.3) v1(104.2,146.3)
NetCatodos1_3: Catodos1.3 D3.2 D19.2 D35.2 D51.2 D67.2 D83.2 D99.2 D115.2 D131.2 D147.2 D163.2 D179.2 D195.2 D211.2 D227.2 D243.2 | length 220.4
  Top Layer w0.254: D243.2 D211.2 D163.2 D131.2 D115.2 D99.2 D83.2 D51.2 D3.2 126.216,274.8 181.172,274.8 Catodos1.3
NetCatodos1_4: Catodos1.4 D4.2 D20.2 D36.2 D52.2 D68.2 D84.2 D100.2 D116.2 D132.2 D148.2 D164.2 D180.2 D196.2 D212.2 D228.2 D244.2 | length 210.1
  Top Layer w0.254: D244.2 D228.2 D196.2 D180.2 D148.2 D116.2 D84.2 D68.2 D52.2 D36.2 D20.2 v1(131.17,266.254)
  Bottom Layer w0.254: v1(131.17,266.254) 133.454,266.254 149.5,282.3 180.92,282.3 Catodos1.4
NetCatodos1_5: Catodos1.5 D5.2 D21.2 D37.2 D53.2 D69.2 D85.2 D101.2 D117.2 D133.2 D149.2 D165.2 D181.2 D197.2 D213.2 D229.2 D245.2 | length 195.9
  Top Layer w0.254: D245.2 D213.2 D181.2 D165.2 D133.2 D117.2 D53.2 D5.2 152.016,273.6 182.512,273.6 Catodos1.5
NetCatodos1_6: Catodos1.6 D6.2 D22.2 D38.2 D54.2 D70.2 D86.2 D102.2 D118.2 D134.2 D150.2 D166.2 D182.2 D198.2 D214.2 D230.2 D246.2 | length 183.5
  Top Layer w0.254: D246.2 D214.2 D182.2 D150.2 D118.2 D86.2 D70.2 D22.2 v1(158.17,266.254)
  Bottom Layer w0.254: v1(158.17,266.254) 170.216,278.3 184.672,278.3 Catodos1.6
NetCatodos1_7: Catodos1.7 D7.2 D23.2 D39.2 D55.2 D71.2 D87.2 D103.2 D119.2 D135.2 D151.2 D167.2 D183.2 D199.2 D215.2 D231.2 D247.2 | length 171.5
  Top Layer w0.254: D247.2 D215.2 D151.2 D135.2 D71.2 D39.2 D7.2 174.454,266.254 180.6,272.4 183.852,272.4 Catodos1.7
NetCatodos1_8: Catodos1.8 D8.2 D24.2 D40.2 D56.2 D72.2 D88.2 D104.2 D120.2 D136.2 D152.2 D168.2 D184.2 D200.2 D216.2 D232.2 D248.2 | length 165.9
  Top Layer w0.254: D248.2 D216.2 D168.2 D152.2 D104.2 D72.2 D56.2 D24.2 v1(185.17,266.254)
  Bottom Layer w0.254: v1(185.17,266.254) 189.8,270.884 189.8,278.5 Catodos1.8
NetCatodos1_9: Catodos1.9 D9.2 D25.2 D41.2 D57.2 D73.2 D89.2 D105.2 D121.2 D137.2 D153.2 D169.2 D185.2 D201.2 D217.2 D233.2 D249.2 | length 164
  Top Layer w0.254: Catodos1.9 191.146,275.354 198.67,267.83 D9.2 D25.2 D41.2 D73.2 D89.2 D121.2 D153.2 D169.2 D185.2 D217.2 D233.2 D249.2
NetCatodos1_10: Catodos1.10 D10.2 D26.2 D42.2 D58.2 D74.2 D90.2 D106.2 D122.2 D138.2 D154.2 D170.2 D186.2 D202.2 D218.2 D234.2 D250.2 | length 178
  Top Layer w0.254: D250.2 D234.2 D218.2 D186.2 D154.2 D122.2 D90.2 212.17,246.254 D26.2 v1(212.17,266.254)
  Bottom Layer w0.254: Catodos1.10 191.146,278.753 192.277,277.622 192.277,276.123 195.6,272.8 205.624,272.8 v1(212.17,266.254)
NetCatodos1_11: Catodos1.11 D11.2 D27.2 D43.2 D59.2 D75.2 D91.2 D107.2 D123.2 D139.2 D155.2 D171.2 D187.2 D203.2 D219.2 D235.2 D251.2 | length 186.5
  Top Layer w0.254: Catodos1.11 198.64,272.2 219.724,272.2 D11.2 D27.2 D59.2 D75.2 D91.2 D107.2 D139.2 D187.2 D203.2 D219.2 D251.2
NetCatodos1_12: Catodos1.12 D12.2 D28.2 D44.2 D60.2 D76.2 D92.2 D108.2 D124.2 D140.2 D156.2 D172.2 D188.2 D204.2 D220.2 D236.2 D252.2 | length 201.1
  Top Layer w0.254: D252.2 D220.2 D172.2 D156.2 D108.2 D76.2 D60.2 D28.2 v1(239.17,266.254)
  Bottom Layer w0.254: Catodos1.12 194.98,278.4 227.024,278.4 v1(239.17,266.254)
NetCatodos1_13: Catodos1.13 D13.2 D29.2 D45.2 D61.2 D77.2 D93.2 D109.2 D125.2 D141.2 D157.2 D173.2 D189.2 D205.2 D221.2 D237.2 D253.2 | length 211
  Top Layer w0.254: Catodos1.13 199.48,273.9 245.024,273.9 D13.2 D29.2 D45.2 D61.2 D93.2 D109.2 D125.2 D141.2 D205.2 D221.2 D253.2
NetCatodos1_14: Catodos1.14 D14.2 D30.2 D46.2 D62.2 D78.2 D94.2 D110.2 D126.2 D142.2 D158.2 D174.2 D190.2 D206.2 D222.2 D238.2 D254.2 | length 227.3
  Top Layer w0.254: D254.2 D222.2 D190.2 D174.2 D158.2 D110.2 D78.2 D62.2 v1(266.17,266.254)
  Bottom Layer w0.254: Catodos1.14 198.332,281.8 250.624,281.8 v1(266.17,266.254)
NetCatodos1_15: Catodos1.15 D15.2 D31.2 D47.2 D63.2 D79.2 D95.2 D111.2 D127.2 D143.2 D159.2 D175.2 D191.2 D207.2 D223.2 D239.2 D255.2 | length 235.4
  Top Layer w0.254: Catodos1.15 268.77,277.154 D15.2 D63.2 D79.2 D95.2 D127.2 D159.2 D175.2 D191.2 D207.2 D223.2 D255.2
NetCatodos1_16: Catodos1.16 D16.2 D32.2 D48.2 D64.2 D80.2 D96.2 D112.2 D128.2 D144.2 D160.2 D176.2 D192.2 D208.2 D224.2 D240.2 D256.2 | length 250
  Top Layer w0.254: Catodos1.16 279.73,279.694 D16.2 D32.2 D48.2 D64.2 D80.2 D96.2 D112.2 D128.2 D144.2 D160.2 D176.2 D192.2 D208.2 D224.2 D240.2 D256.2

## Silkscreen, mask and mechanical layers (free items; w line width, h text height)
Board_Outline:
  lines w0.254: 83,111.6 83,294.5 298,294.5 298,111.6 83,111.6

## Text inside footprints (layer, text, board x,y; h text height)
Anodos1: Top Overlay "16" at 107.967,279.186 h1.27; Top Overlay "15" at 107.967,276.646 h1.27; Top Overlay "1" at 86.123,276.646 h1.27; Top Overlay "2" at 86.123,279.186 h1.27
Anodos2: Top Overlay "16" at 107.967,290.192 h1.27; Top Overlay "15" at 107.967,287.652 h1.27; Top Overlay "1" at 86.123,287.652 h1.27; Top Overlay "2" at 86.123,290.192 h1.27
Catodos1: Top Overlay "16" at 200.29,279.186 h1.27; Top Overlay "15" at 200.29,276.646 h1.27; Top Overlay "1" at 178.446,276.646 h1.27; Top Overlay "2" at 178.446,279.186 h1.27